# Altium PCB PCB1.PcbDoc
Units mil, origin at the board's own origin, x right, y up, seen from the top; angles counter-clockwise.
Board outline 6000 x 4000 mil, 2 copper layers (Top Layer, Bottom Layer); 40 components, 37 nets, 170 pads, 27 vias.
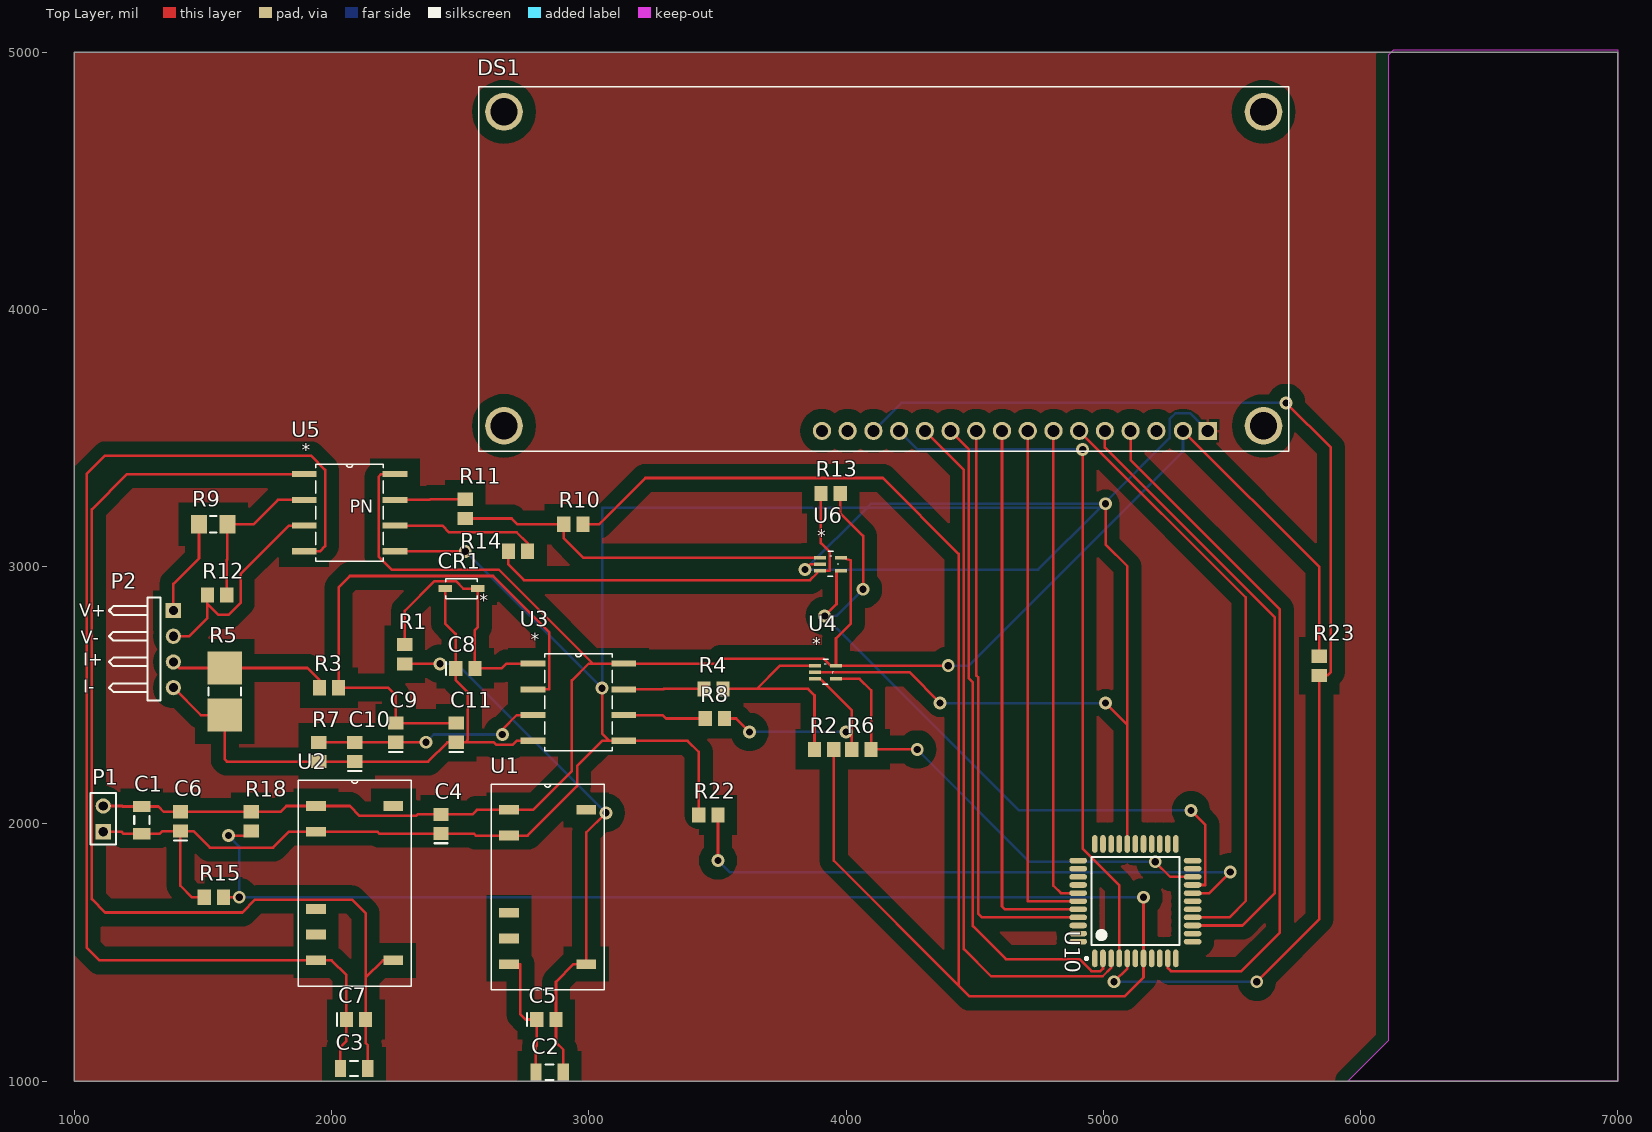
[diagram p0: Top Layer view]
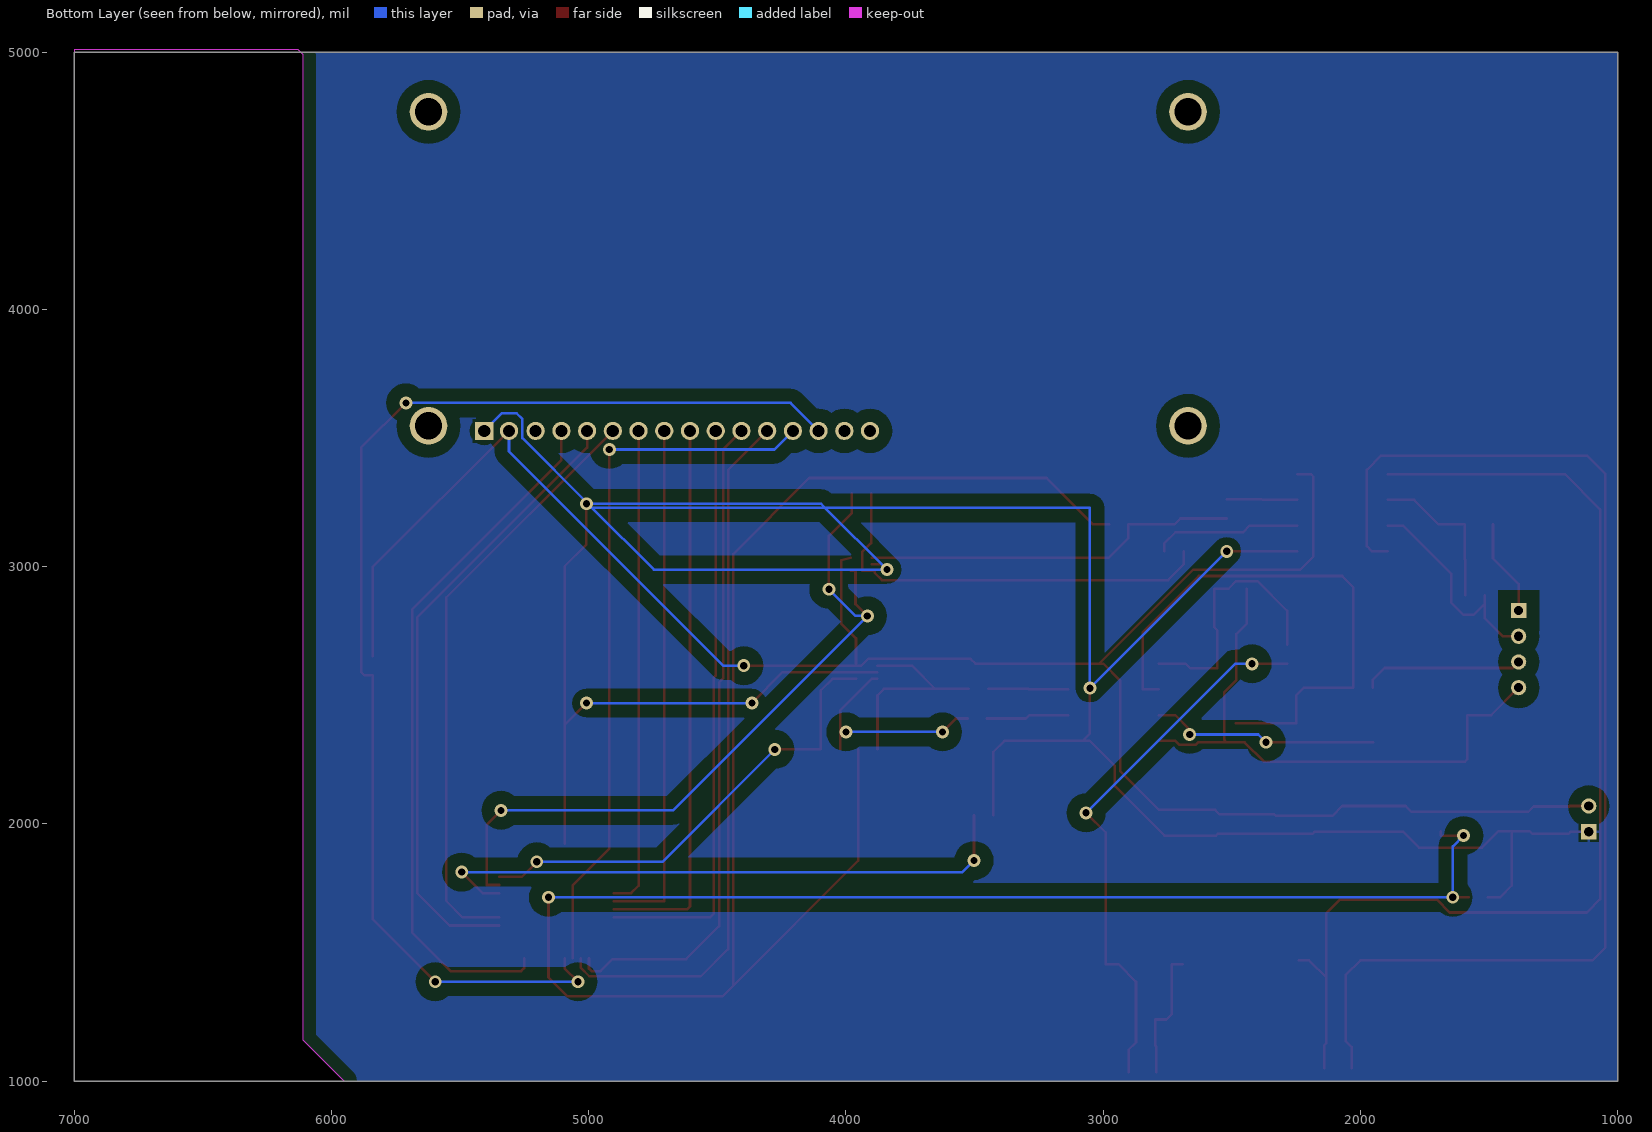
[diagram p1: Bottom Layer view, seen from below]

## Layer stack, top to bottom
Top Solder: solder mask 0.4, Solder Resist, Dk 3.5
Top Layer: signal copper 1.4
Dielectric 1: dielectric 12.6, FR-4, Dk 4.8
Bottom Layer: signal copper 1.4
Bottom Solder: solder mask 0.4, Solder Resist, Dk 3.5

## Board outline
1000,1000 7000,1000 7000,5000 1000,5000
cut-out: 7000,1000 5950,1000 6110,1160 6110,4990 6130,5010 7000,5010

## Design rules (kind name [scope] priority, off if disabled: settings)
Clearance "Copper Pour" [inPolygon] p1: gap=50
Clearance [All] p2: gap=10
PolygonConnect [All] p1: connectstyle=Relief reliefconductorwidth=10 reliefentries=4 polygonreliefangle="90 Angle" airgapwidth=10
RoutingVias [All] p1: holewidth=28 width=50 viastyle="Through Hole" minholewidth=28 minwidth=50 maxholewidth=28 maxwidth=50
SolderMaskExpansion [All] p1: expansion=4
Width [All] p1: maxlimit=10 minlimit=10 preferedwidth=10
30 further rules are at their usual default settings.

## Classes and differential pairs
component class Sheet3: DS1 R9 R10 R11 R12 R13 R14 R22 R23 U5 U6 U10
component class Sheet2: C8 C9 C10 C11 CR1 R1 R2 R3 R4 R5 R6 R7 R8 U3 U4
component class Sheet1: C1 C2 C3 C4 C5 C6 C7 P1 P2 R15 R18 U1 U2

## Components (designator, comment, footprint, x,y, rotation, side; value= is the part's Value field where it differs from the comment)
C1 "Cap Semi" C1206 1262.6,2015 r90 top
C2 "Cap Semi" C1206 2847.6,1035 r0 top
C3 "Cap Semi" C1206 2087.6,1050 r0 top
C4 "C0805" 0805 2425,2000 r90 top
C5 "C0805" 0805 2835.2,1240 r0 top
C6 "C0805" 0805 1412.6,2010 r90 top
C7 "C0805" 0805 2095.2,1240 r0 top
C8 "C0805" 0805 2520,2605 r0 top
C9 "C0805" 0805 2250,2355 r90 top
C10 "C0805" 0805 2090,2280 r90 top
C11 "C0805" 0805 2485,2355 r90 top
CR1 "BZT52C6V8-V-GS08" SOD123 2505,2915 r180 top
DS1 "LCM-S01602DTR/A" LCD_LCM-S01602DTR/A 4125,4170 r180 top
P1 "Header 2" HDR1X2 1112.6,1970 r90 top
P2 "Header 4H" HDR1X4H 1385,2830 r270 top
R1 "ERJ6EN" 6-0805 2285,2660 r270 top
R2 "ERJ6EN" 6-0805 3915,2290 r0 top
R3 "ERJ6EN" 6-0805 1990,2530 r0 top
R4 "ERJ6EN" 6-0805 3485,2525 r0 top
R5 "ERJM1WT" M1WT-2512 1585,2515 r90 top
R6 "ERJ6EN" 6-0805 4060,2290 r0 top
R7 "ERJ6EN" 6-0805 1950,2280 r90 top
R8 "ERJ6EN" 6-0805 3490,2410 r0 top
R9 "ERJ8EN" 8-1206 1540,3165 r180 top
R10 "ERJ6EN" 6-0805 2940,3165 r0 top
R11 "ERJ6EN" 6-0805 2520,3225 r270 top
R12 "ERJ6EN" 6-0805 1555,2890 r0 top
R13 "ERJ6EN" 6-0805 3940,3285 r0 top
R14 "ERJ6EN" 6-0805 2725,3060 r0 top
R15 "ERJ6EN" 6-0805 1542.6,1715 r0 top
R18 "ERJ6EN" 6-0805 1687.6,2010 r90 top
R22 "ERJ6EN" 6-0805 3465,2035 r0 top
R23 "ERJ6EN" 6-0805 5840,2615 r90 top
U1 "DCP010505B_DUA_7" DUA7 2840.2,1755 r0 top
U2 "DCP010505B_DUA_7" DUA7 2090.2,1770 r0 top
U3 "AMC1200_DUB_8" DUB8 2960,2473.46 r0 top
U4 "OPA376_DCK_5" DCK5 3920,2590 r0 top
U5 "AMC1100_DUB_8" DUB8 2070,3210 r0 top
U6 "OPA376_DCK_5" DCK5 3940,3010 r0 top
U10 "PIC18F45K20-I/PT" TQFP-PT44_N 5125,1700 r90 top

## Footprints (in the part's own frame and the unit in brackets; to place one, negate y for a bottom-side part, rotate by r counter-clockwise, add the part's x,y. Pads: shape width x height; smd on the part's side, far side on the other; paste and mask are expansions set on the pad)
6-0805 [mm] "Chip Resistor; Body 2 x 1.2 mm (LxW typ)"
  rect 1.3x1.5 smd: 1(-0.95,0) 2(0.95,0)
8-1206 [mm] "Chip Resistor; Body 3.1 x 1.6 mm (LxW typ)"
  rect 1.6x1.8 smd: 1(-1.4,0) 2(1.4,0)
  silkscreen extent -0.3,-0.8 0.3,0.8
0805 [mm] "Chip Capacitor; Body 2.0 x 1.2 mm (LxW typ)"
  rect 1.3x1.5 smd: 1(-0.95,0) 2(0.95,0)
  silkscreen extent -1.9,-0.65 -1.9,0.65
C1206 [mm] "Chip Capacitor, Body 3.2x1.6mm, IPC High Density"
  rect 1.1x1.7 smd: 1(-1.35,0) 2(1.35,0)
  silkscreen extent -0.4,-0.75 0.4,0.75, body extent -1.7,-0.9 1.7,0.9, height 1.3
DCK5 [mil]
  rect 46x14 smd: 1(-41,25.59) 2(-41,0) 3(-41,-25.59) 4(41,-25.59) 5(41,25.59)
  silkscreen extent -10,-47 30,50
DUA7 [mil]
  rect 77x38 smd: 1(-150,300) 2(-150,200) 3(-150,-100) 4(-150,-200) 5(-150,-300) 6(150,-300) 7(150,300)
  silkscreen extent -220,-400 220,400
DUB8 [mil]
  rect 96.5x24 smd: 1(-176.25,150) 2(-176.25,50) 3(-176.25,-50) 4(-176.25,-150) 5(176.25,-150) 6(176.25,-50) 7(176.25,50) 8(176.25,150)
  silkscreen extent -132,-188 132,188
HDR1X2 [mm] "Connector; Header; 2 Position"
  rect 1.5x1.5 hole 0.9: 1(0,0)
  round 1.5 hole 0.9: 2(2.54,0)
  silkscreen extent -1.27,-1.27 3.81,1.27
HDR1X4H [mm] "Connector; Header; 4 Position; Right Angle"
  rect 1.5x1.5 hole 0.9: 1(0,0)
  round 1.5 hole 0.9: 2(2.54,0) 3(5.08,0) 4(7.62,0)
  silkscreen extent -1.27,-6.35 8.89,-1.27
LCD_LCM-S01602DTR/A [mm]
  rect 1.8x1.8 hole 1.2: 1(-32.55,16.3)
  round 1.8 hole 1.2: 2(-30.1,16.3) 3(-27.47,16.3) 4(-24.93,16.3) 5(-22.39,16.3) 6(-19.85,16.3) 7(-17.31,16.3) 8(-14.77,16.3) 9(-12.23,16.3) 10(-9.69,16.3) 11(-7.15,16.3) 12(-4.61,16.3) 13(-2.07,16.3) 14(0.47,16.3) 15(3.01,16.3) 16(5.55,16.3)
  round 3.716 hole 2.7: 17(-38.05,15.8) 18(-38.05,-15.2) 19(36.95,15.8) 20(36.95,-15.2)
  silkscreen extent -40.55,-17.7 39.45,18.3
M1WT-2512 [mm] "Chip Resistor; Body 6.4 x 3.2 mm (LxW typ)"
  rect 3.25x3.4 smd: 1(-2.325,0) 2(2.325,0)
  silkscreen extent -0.4,-1.6 0.4,1.6
SOD123 [mil]
  rect 53x28 smd paste+0 mask+0: 1(-63.5,0) 2(63.5,0)
  silkscreen extent -61,-39 61,39, body extent 0,0 10,10, height 10
TQFP-PT44_N [mm] "Thin QFP, 44-Leads, Body 10x10mm, Pitch 0.8mm, IPC Medium Density"
  oval 1.75x0.55 smd: 1(-5.65,4) 2(-5.65,3.2) 3(-5.65,2.4) 4(-5.65,1.6) 5(-5.65,0.8) 6(-5.65,0) 7(-5.65,-0.8) 8(-5.65,-1.6) 9(-5.65,-2.4) 10(-5.65,-3.2) 11(-5.65,-4) 23(5.65,-4) 24(5.65,-3.2) 25(5.65,-2.4) 26(5.65,-1.6) 27(5.65,-0.8) 28(5.65,0) 29(5.65,0.8) 30(5.65,1.6) 31(5.65,2.4) 32(5.65,3.2) 33(5.65,4)
  oval 0.55x1.75 smd: 12(-4,-5.65) 13(-3.2,-5.65) 14(-2.4,-5.65) 15(-1.6,-5.65) 16(-0.8,-5.65) 17(0,-5.65) 18(0.8,-5.65) 19(1.6,-5.65) 20(2.4,-5.65) 21(3.2,-5.65) 22(4,-5.65) 34(4,5.65) 35(3.2,5.65) 36(2.4,5.65) 37(1.6,5.65) 38(0.8,5.65) 39(0,5.65) 40(-0.8,5.65) 41(-1.6,5.65) 42(-2.4,5.65) 43(-3.2,5.65) 44(-4,5.65)
  silkscreen extent -5.77,-4.35 4.35,4.95, body extent -5,-5 5,5, height 1.2

## Part data
C1 C2 C3: "Capacitor (Semiconductor SIM Model)"
C4 C5 C6 C7 C8 C9 C10 C11: "Ceramic Chip Capacitor - Standard"
CR1 U1 U2 U3 U4 U5 U6: "Imported"
DS1: "Module, LCD; 16 x 2 mm; 5 x 8; 5 V (Typ.); 2 mA (Typ.); 4.2 V @50 degC (Min.)"
P1: "Header, 2-Pin"
P2: "Header, 4-Pin, Right Angle"
R1 R2 R3 R4 R6 R7 R8 R10 R11 R12 R13 R14 R15 R18 R22 R23: "Precision Thick Film Chip Resistor, 10 Ohm to 2.2M Ohm Range, 1% Tolerance, 0805 Size, 0.1 W"
R5: "Low Resistance Value Chip Resistor, 2m Ohm to 4m Ohm Range, 1% and 5% Tolerance, 2512 Size, 1 W"
R9: "Precision Thick Film Chip Resistor, 10 Ohm to 2.2M Ohm Range, 1% Tolerance, 1206 Size, 0.125 W"
U10: "Flash Microcontroller with 10-Bit A/D and nanoWatt Technology, 32K Flash, 44-Pin TQFP, Industrial Temperature Range"

## Via types
v1: diameter 50, hole 28, Top Layer to Bottom Layer, 27 vias

## Nets (pads, with @x,y where several pads share a name; then routed paths per layer and width w, separated by ;. In a path a pad name is that pad's centre, name@x,y a point inside that pad or via, vN(x,y) a via of type N, cw(c..) or ccw(c..) an arc to the next point about the centre after c; other vN are vias at no path point)
GND_1: C1.1 C4.1 C6.1 DS1.1 P1.1 R15.1 R22.1 U1.2 U2.2 U3.5 U4.2 U5.5 U6.2 U10.29 | length 12959.3
  Top Layer w10: P1.1 1183,1970 1191.15,1961.85 C1.1 1332,1961.85 1342.75,1972.6 C6.1 ; R15.1 1457.6,1715 1412.6,1760 C6.1 ; U5.5 v1(2520,3060) ; v1(3052,2528) 3052,2351.46 3080,2323.46 ; R22.1 3427.6,2280 3384.13,2323.46 U3.5 3080,2323.46 ; v1(3841,2989) 3862,3010 U6.2 ; U4.2 4246,2590 v1(4366,2470) ; v1(5009,2470) 5093.5,2385.5 ; v1(5009,3245) 5009,3086.5 5093.5,3002 5093.5,2385.5 ; U10.29 5093.5,2385.5 ; C6.1 1462.85,1972.6 1527,1908.45 1772.45,1908.45 1834,1970 U2.2 2178,1970 2185.4,1962.6 C4.1 2553,1962.6 2560.6,1955 U1.2 2762,1955 2954.49,2147.49 2954.49,2226.13 3051.82,2323.46 3080,2323.46
  Bottom Layer w10: v1(2520,3060) v1(3052,2528) 3052,3229 4081,3229 ; v1(4366,2470) v1(5009,2470) ; DS1.1 5338.76,3596 5280,3596 5258,3574 5258,3500 v1@5003,3245 ; 4081,3229 4987,3229 ; 4081,3229 v1(3841,2989) 4747,2989 4987,3229 ; 4081,3229 4097,3245 v1@5003,3245 ; 4987,3229 4993,3229 v1(5009,3245) v1@5003,3245 ; 4987,3229 v1@5003,3245
GND_ISO1: C2.1 C5.1 U1.5 | length 517.3
  Top Layer w10: U1.5 2734,1455 2734,1260 2754,1240 C5.1 2797.8,1138.35 2794.45,1135 C2.1
GND_ISO2: C3.1 C7.1 U2.5 U5.4 | length 4632.5
  Top Layer w10: U5.4 1955,3060 1975,3080 1975,3377 1920,3432 1120,3432 1048,3360 1048,1520 1098,1470 U2.5 2000,1470 2057.8,1412.2 C7.1 2057.8,1156.35 2034.45,1133 C3.1
NetC8_1: C8.1 C10.1 C11.1 CR1.2 P2.4 R5.1 R7.1 U3.4 | length 2298.5
  Top Layer w10: P2.4 1491.54,2423.46 R5.1 1585,2251 1593.4,2242.6 R7.1 C10.1 2375.92,2242.6 2450.92,2317.6 C11.1 2520,2317.6 ; CR1.2 2441.5,2780.1 2482.6,2739 C8.1 2482.6,2559.4 2530,2512 2530,2327.6 2520,2317.6 ; U3.4 2719.47,2323.46 2703.95,2307.94 2640.66,2307.94 2631,2317.6 2520,2317.6
NetC8_2: C8.2 CR1.1 R1.1 U3.1 | length 1023.3
  Top Layer w10: R1.1 2285,2829 2400,2944 2483,2944 2512,2915 CR1.1 2568.5,2765.1 2557.4,2754 C8.2 2661,2605 2679.46,2623.46 U3.1
NetC9_1: C9.1 C10.2 R7.2 U3.3 | length 889.1
  Top Layer w10: R7.2 C10.2 2204.49,2317.4 2204.68,2317.6 C9.1 v1(2367,2317.6) ; v1(2664,2348) 2664,2367.46 2720,2423.46 U3.3
  Bottom Layer w10: v1(2367,2317.6) 2397.4,2348 v1(2664,2348)
NetC9_2: C9.2 C11.2 R3.2 U3.2 | length 2180.9
  Top Layer w10: C11.2 C9.2 2250,2500 2220,2530 R3.2 2027.4,2920 2071.4,2964 2628,2964 2847,2745 2847,2523.46 U3.2
NetDS1_4: DS1.4 U10.10 | length 2731.2
  Top Layer w10: DS1.4 5106.5,3414.5 5687,2834 5687,1578.34 5536.66,1428 5262.98,1428 5250.98,1440 U10.10
NetDS1_5: DS1.5 U10.14 | length 2441.8
  Top Layer w10: DS1.5 5006.5,3463.5 5667,2803 5667,1732 5540.51,1605.51 U10.14
NetDS1_6: DS1.6 U10.15 | length 2328.5
  Top Layer w10: DS1.6 5554,2880.76 5554,1701.01 5490,1637.01 U10.15
NetDS1_7: DS1.7 U10.38 | length 1876.1
  Top Layer w10: DS1.7 4806.5,1760 4835,1731.5 U10.38
NetDS1_8: DS1.8 U10.39 | length 2024
  Top Layer w10: DS1.8 4706.5,1700.5 4707,1700 U10.39
NetDS1_9: DS1.9 U10.40 | length 2149.4
  Top Layer w10: DS1.9 4606.5,1679.5 4617.5,1668.5 U10.40
NetDS1_10: DS1.10 U10.41 | length 2274.1
  Top Layer w10: DS1.10 4506.5,2577.36 4513.39,2570.46 4513.39,1652.61 4529,1637.01 U10.41
NetDS1_11: DS1.11 U10.2 | length 2582.6
  Top Layer w10: DS1.11 4478,3456.76 4478,2565.85 4493.39,2550.46 4493.39,1603.61 4622,1475 4907,1475 4953.89,1428.11 4989.13,1428.11 4999.02,1438 U10.2
NetDS1_12: DS1.12 U10.3 | length 2743.9
  Top Layer w10: DS1.12 4458,3376.76 4458,1514 4563.89,1408.11 4998.11,1408.11 5030.51,1440.51 U10.3
NetDS1_13: DS1.13 U10.4 | length 2780.7
  Top Layer w10: v1(4920,3456) 4920,1904 5062.01,1761.99 U10.4
  Bottom Layer w10: DS1.13 4278.76,3456 v1(4920,3456)
NetDS1_14: DS1.14 R23.1 U10.5 | length 4776.9
  Top Layer w10: v1(5042,1387) 5093.5,1438.5 U10.5 ; v1(5597,1387) 5840,1630 R23.1 5872.6,2577.6 5885,2590 5885,3463 v1(5711,3637)
  Bottom Layer w10: DS1.14 4215.23,3637 v1(5711,3637) ; v1(5042,1387) v1(5597,1387)
NetP2_1: P2.1 R9.2 | length 376.4
  Top Layer w10: P2.1 1385,2933 1484.88,3032.88 R9.2
NetP2_2: P2.2 R12.1 U5.3 | length 854.6
  Top Layer w10: P2.2 1447.6,2730 1517.6,2800 1517.6,2855.4 ; R12.1 1517.6,2855.4 ; U5.3 1835,3160 1647,2972 1647,2860 1600,2813 1560,2813 1517.6,2855.4
NetP2_3: P2.3 R3.1 R5.2 | length 626.6
  Top Layer w10: P2.3 1408.46,2606.54 R5.2 1906.06,2606.54 1952.6,2560 R3.1
NetR2_1: R2.1 R4.2 U4.1 | length 839.1
  Top Layer w10: R4.2 3653,2525 ; R2.1 3877.6,2500 3852.6,2525 3653,2525 ; U4.1 3743.59,2615.59 3653,2525
NetR4_1: R4.1 U3.7 | length 312
  Top Layer w10: U3.7 3291,2523.46 3292.54,2525 R4.1
NetR6_1: R6.1 R8.2 U4.3 | length 872.3
  Top Layer w10: R8.2 3573,2410 v1(3625,2358) ; U4.3 3900,2564.41 4022.6,2441.81 4022.6,2335.4 ; v1(4000,2358) 4022.6,2335.4 ; R6.1 4022.6,2335.4
  Bottom Layer w10: v1(3625,2358) v1(4000,2358)
NetR6_2: R6.2 U4.4 U10.20 | length 1840.1
  Top Layer w10: U4.4 4052.99,2564.41 4097.4,2520 R6.2 v1(4277,2290) ; v1(5202,1853) 5260.51,1794.49 U10.20
  Bottom Layer w10: v1(4277,2290) 4714,1853 v1(5202,1853)
NetR8_1: R8.1 U3.6 | length 321.9
  Top Layer w10: U3.6 3287,2423.46 3300.46,2410 R8.1
NetR9_1: R9.1 R12.2 U5.2 | length 614.1
  Top Layer w10: R12.2 1592.4,3026 1595.12,3028.72 R9.1 1696,3165 1791,3260 U5.2
NetR10_1: R10.1 R11.2 U6.1 | length 1473.6
  Top Layer w10: R11.2 2700,3187.6 2722.6,3165 R10.1 2902.6,3111 2978.01,3035.59 U6.1
NetR11_1: R11.1 U5.7 | length 274.7
  Top Layer w10: U5.7 2381,3260 2383.4,3262.4 R11.1
NetR13_1: R13.1 R14.1 U6.3 | length 1659.8
  Top Layer w10: R14.1 2687.6,3009 2748.21,2948.39 3860,2948.39 3888.32,2976.71 3888.32,2984.41 U6.3 3937,2984.41 3937,3058 3902.6,3092.4 R13.1
NetR13_2: R13.2 U6.4 U10.19 | length 2914.1
  Top Layer w10: v1(3917,2809) 3963,2855 3963,2984.41 U6.4 ; R13.2 3977.4,3208.6 4066.5,3119.5 v1(4066.5,2912.5) ; v1(5341,2053) 5397,1997 5397,1762.99 U10.19
  Bottom Layer w10: v1(4066.5,2912.5) 3963,2809 v1(3917,2809) 4673,2053 v1(5341,2053)
NetR14_2: R14.2 U5.6 | length 576.1
  Top Layer w10: U5.6 2431,3160 2457,3134 2720,3134 2762.4,3091.6 R14.2
NetR22_2: R22.2 U10.18 | length 2367.6
  Top Layer w10: v1(3502.4,1858) R22.2 ; U10.18 5412.5,1731.5 v1(5494,1813)
  Bottom Layer w10: v1(3502.4,1858) 3547.4,1813 v1(5494,1813)
VCM: R2.2 R10.2 R15.2 R18.1 U10.7 | length 9472
  Top Layer w10: R15.2 v1(1641,1715) ; v1(1599,1955) 1687.6,1955 R18.1 ; R10.2 3040,3165 3220,3345 4143,3345 4438,3050 4438,1372 ; R2.2 3952.4,1857.6 4438,1372 ; v1(5156.5,1715) U10.7 5156.5,1404.16 5082.33,1330 4480,1330 4438,1372
  Bottom Layer w10: v1(1599,1955) 1641,1913 v1(1641,1715) v1(5156.5,1715)
VDD_1: C1.2 C4.2 C6.2 DS1.2 P1.2 R18.2 R23.2 U1.1 U2.1 U3.8 U4.5 U5.8 U6.5 | length 8076.6
  Top Layer w10: P1.2 1186,2070 1187.85,2068.15 C1.2 1327,2068.15 1347.75,2047.4 C6.2 R18.2 1802,2047.4 1824.6,2070 U2.1 2071,2070 2109,2032 2329,2032 2334.4,2037.4 C4.2 2548,2037.4 2565.6,2055 U1.1 2782.56,2055 2934.49,2206.93 2934.49,2557.96 3000,2623.46 3015.54,2623.46 ; U5.8 2193,3360 2183,3350 2183,3040 2234,2989 2650,2989 3015.54,2623.46 ; U6.5 4019,3024.59 4019,2780 3961,2722 U4.5 ; v1(4397.36,2615.59) U4.5 ; DS1.2 5840,2998.31 R23.2 ; 3015.54,2623.46 U3.8 3497.46,2623.46 3516,2642 3913.59,2642 3940,2615.59 U4.5
  Bottom Layer w10: v1(4397.36,2615.59) 4477.63,2615.59 5310.04,3448 DS1.2
VDD_ISO1: C2.2 C5.2 R1.2 U1.6 | length 2150.5
  Top Layer w10: R1.2 v1(2421.4,2622.6) ; C2.2 2900.75,1123 2872.6,1151.15 C5.2 2872.6,1386.6 2941,1455 U1.6 2990.2,1967.2 v1(3066.43,2043.43)
  Bottom Layer w10: v1(2421.4,2622.6) 2487.27,2622.6 v1(3066.43,2043.43)
VDD_ISO2: C3.2 C7.2 U2.6 U5.1 | length 4268.4
  Top Layer w10: U5.1 1205,3360 1068,3223 1068,1708 1120,1656 1653,1656 1703,1706 2080,1706 2132.6,1653.4 2132.6,1402.6 ; C3.2 2140.75,1140 2132.6,1148.15 C7.2 2132.6,1402.6 ; U2.6 2200,1470 2132.6,1402.6
pads on no net: DS1.3 DS1.15 DS1.16 DS1.17 DS1.18 DS1.19 DS1.20 U1.3 U1.4 U1.7 U2.3 U2.4 U2.7 U10.1 U10.6 U10.8 U10.9 U10.11 U10.12 U10.13 U10.16 U10.17 U10.21 U10.22 U10.23 U10.24 U10.25 U10.26 U10.27 U10.28 U10.30 U10.31 U10.32 U10.33 U10.34 U10.35 U10.36 U10.37 U10.42 U10.43 U10.44

## Polygon pours and split planes (outlines as drawn)
GND_1 on Bottom Layer "Bottom Overlay-No Net" (solid, pour order 3): 1000,1000 1000,5000 6120,5000 6120,1170 5950,1000
GND_1 on Top Layer "Bottom Overlay-No Net" (solid, pour order 8): 1000,1000 1000,5000 6120,5000 6120,1170 5950,1000

## Silkscreen, mask and mechanical layers (free items; w line width, h text height)
Top Overlay:
  text "V+" at 1020,2805 h50
  text "V-" at 1025,2700 h50
  text "I+" at 1035,2615 h50
  text "I-" at 1035,2510 h50

## Text inside footprints (layer, text, board x,y; h text height)
CR1: Top Overlay "*" at 2610,2915 h50 r180
U3: Top Overlay "*" at 2773.75,2692.46 h50; Mechanical 13 "*" at 2773.75,2692.46 h50
U4: Top Overlay "*" at 3869,2674.59 h50; Mechanical 13 "*" at 3869,2674.59 h50
U5: Top Overlay "PN" at 2070,3210 h50; Top Overlay "*" at 1883.75,3429 h50; Mechanical 13 "*" at 1883.75,3429 h50
U6: Top Overlay "*" at 3889,3094.59 h50; Mechanical 13 "*" at 3889,3094.59 h50